# Altium PCB Microprocessor Module (328)_1.PcbDoc
Units mil, origin at the board's own origin, x right, y up, seen from the top; angles counter-clockwise.
Board outline 2850.55 x 2750.55 mil, 2 copper layers (Top Layer, Bottom Layer); 23 components, 27 nets, 115 pads, 36 vias.
Unrouted connection lines stored in the file: 26.
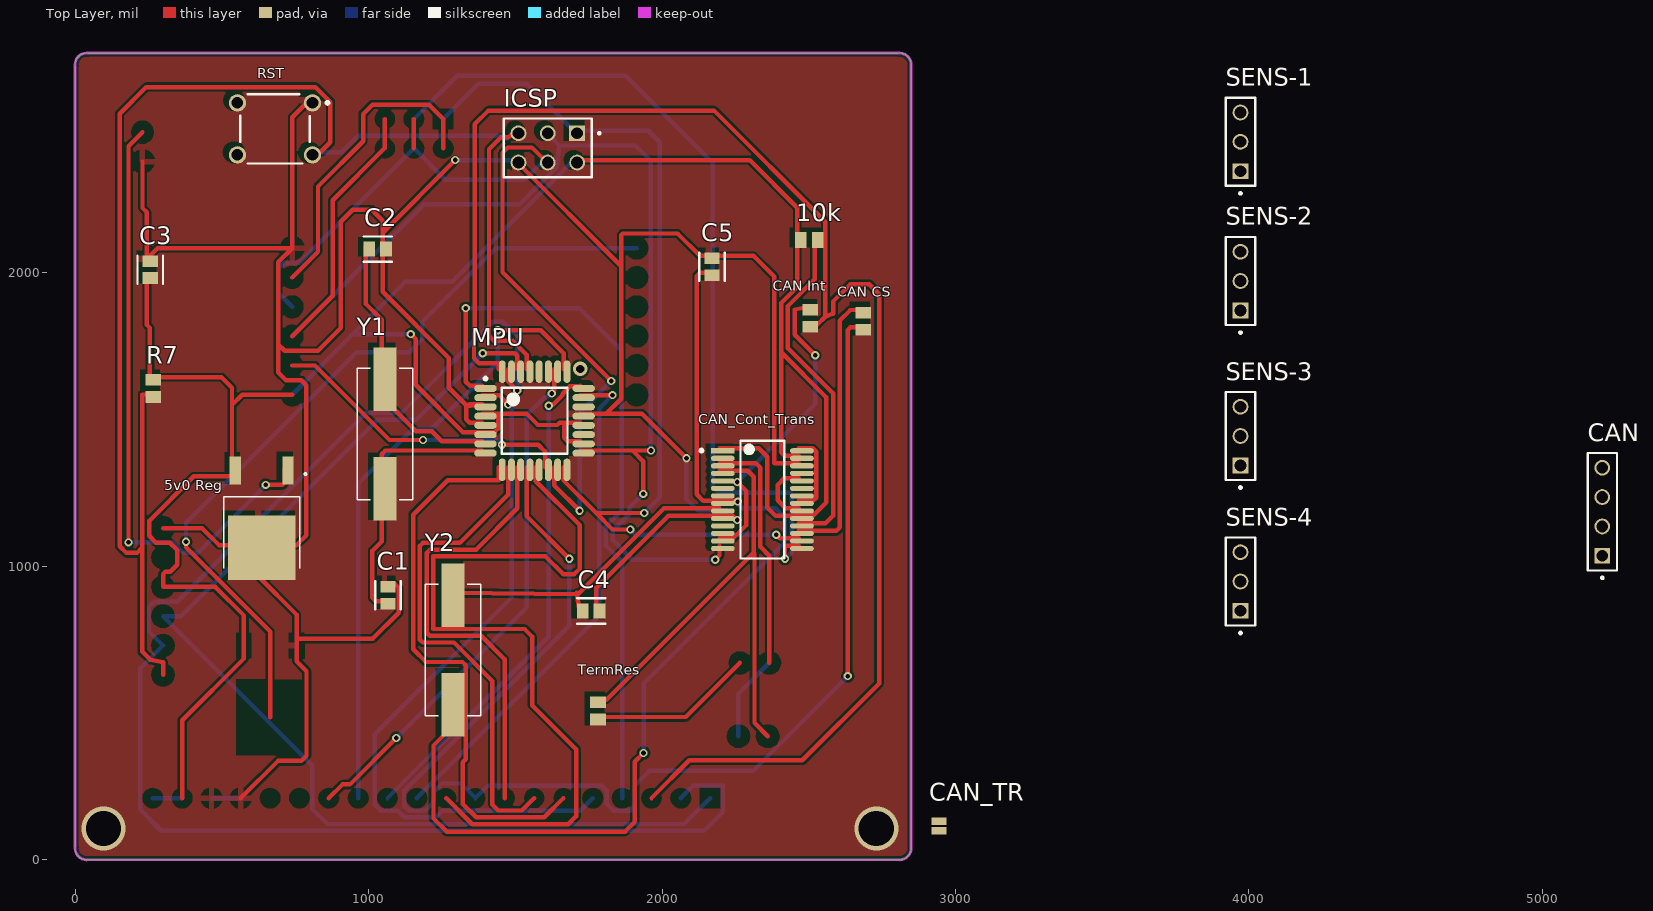
[diagram p0: Top Layer view]
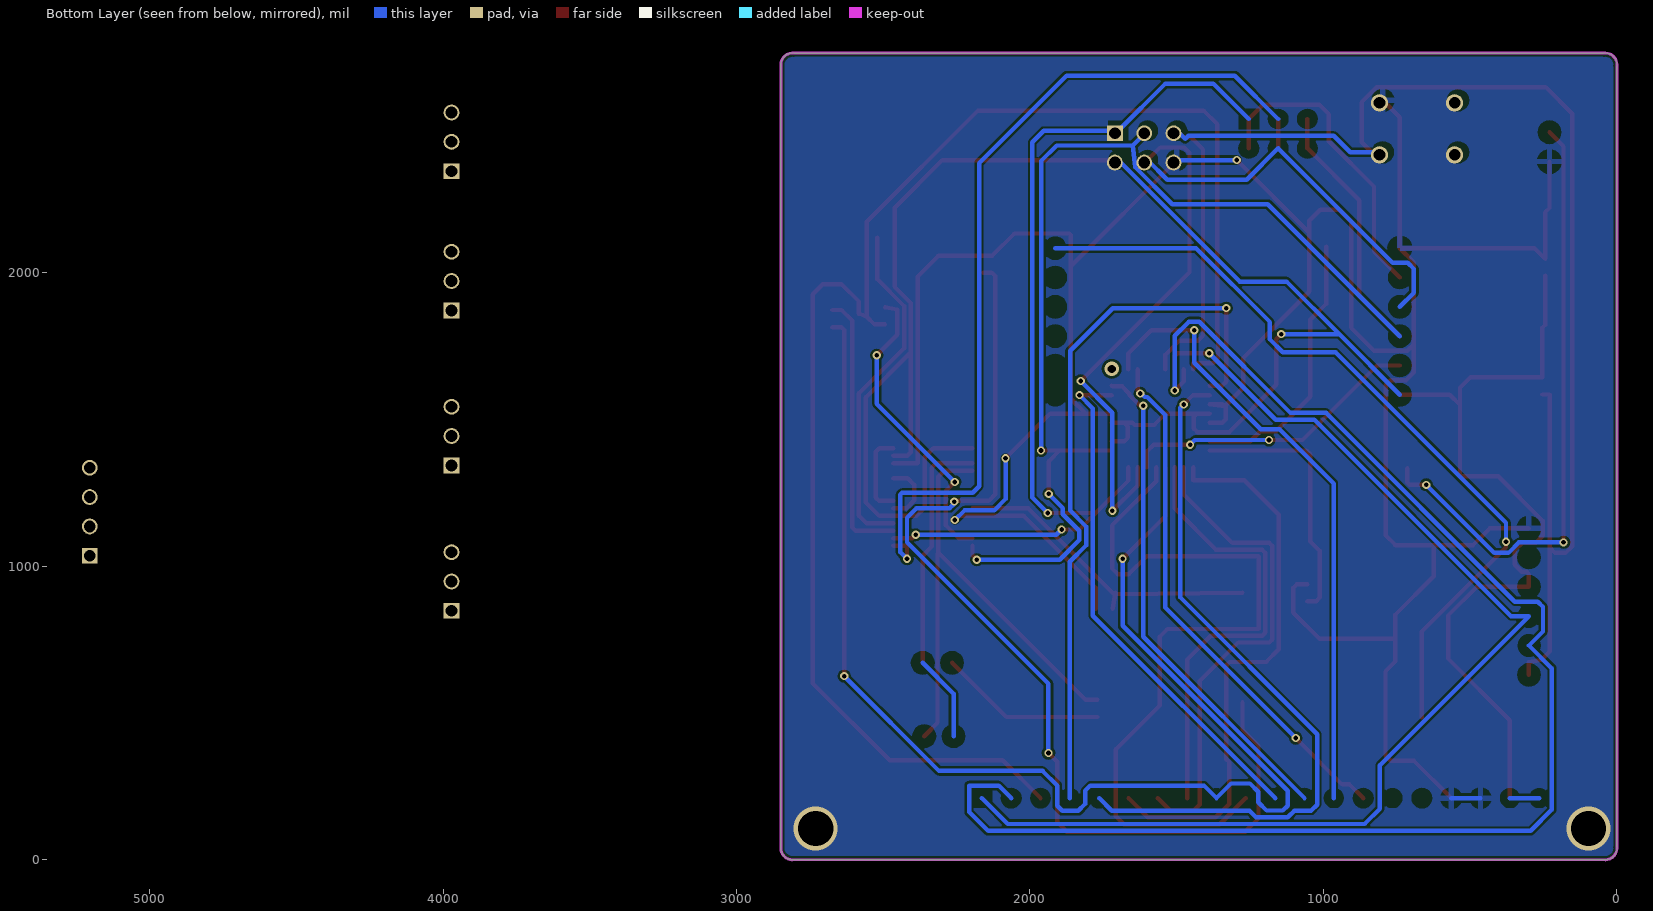
[diagram p1: Bottom Layer view, seen from below]

## Layer stack, top to bottom
Top Solder: solder mask 0.4, Solder Resist, Dk 3.5
Top Layer: signal copper 1.4
Dielectric 1: dielectric 12.6, FR-4, Dk 4.8
Bottom Layer: signal copper 1.4
Bottom Solder: solder mask 0.4, Solder Resist, Dk 3.5

## Board outline
43.61,-1.39 cw(c38.61,38.61) -1.39,43.61 -1.39,2703.61 cw(c38.61,2708.61) 43.61,2748.61 2803.61,2748.61 cw(c2808.61,2708.61) 2848.61,2703.61 2848.61,43.61 cw(c2808.61,38.61) 2803.61,-1.39

## Design rules (kind name [scope] priority, off if disabled: settings)
BoardOutlineClearance [All] p1: gap=7.87 ignorepadtopadclearanceinfootprint=FALSE except(15.75: Arc-SplitBarrior Arc-SplitContinuation Track-SplitBarrior Track-SplitContinuation SMDPad-SplitBarrior SMDPad-SplitContinuation THPad-SplitBarrior THPad-SplitContinuation Via-SplitBarrior Via-SplitContinuation Fill-SplitBarrior Fill-SplitContinuation Poly-SplitBarrior Poly-SplitContinuation Region-SplitBarrior Region-SplitContinuation Text-SplitBarrior Text-SplitContinuation)
Clearance "Clearance Bottom Layer" [OnLayer('Bottom Layer')] p1: gap=8 ignorepadtopadclearanceinfootprint=TRUE except(10: Arc-Text Track-Text SMDPad-Text THPad-Text Via-Text Fill-Text Poly-Text Region-Text Text-Text)
Clearance "Clearance Top Layer" [OnLayer('Top Layer')] p2: gap=8 ignorepadtopadclearanceinfootprint=TRUE except(10: Arc-Text Track-Text SMDPad-Text THPad-Text Via-Text Fill-Text Poly-Text Region-Text Text-Text)
Clearance [All] p3: gap=7.87 ignorepadtopadclearanceinfootprint=FALSE except(3.5: Arc-Arc Arc-Track Arc-SMDPad Track-Track Track-SMDPad SMDPad-SMDPad; 5: Arc-Via Track-Via SMDPad-Via THPad-Via Via-Via; 10: Arc-Text Track-Text SMDPad-Text THPad-Text Via-Text Fill-Text Poly-Text Region-Text Text-Text)
HoleSize [All] p1: absolutevalues=TRUE maxlimit=248.03 minlimit=7.87 maxpercent=80.000 minpercent=20.000
MinimumAnnularRing [All] p1: minimumring=3
MinimumSolderMaskSliver [All] p1: minsoldermaskwidth=3.94
PolygonConnect PolygonConnect_1 [All] p1: thpad.connectstyle=Relief thpad.reliefconductorwidth=20 thpad.reliefentries=4 thpad.polygonreliefangle="90 Angle" thpad.airgapwidth=10 smdpad.connectstyle=Relief smdpad.reliefconductorwidth=20 smdpad.reliefentries=4 smdpad.polygonreliefangle="90 Angle" smdpad.airgapwidth=10 via.connectstyle=Direct via.reliefconductorwidth=20 via.reliefentries=4 via.polygonreliefangle="90 Angle" via.airgapwidth=10
RoomDefinition "Microprocessor Module (328)" [InComponentClass('Microprocessor Module (328)')] p1: confinementstyle=ConfineIn formatcopy=TRUE lockcomponents=FALSE outline 2905,45 5130,45 5130,605 2905,605
RoutingCorners [All] p1: cornerstyle=Round minsetback=100 maxsetback=100
RoutingVias [All] p1: holewidth=16 width=28 viastyle="Through Hole" minholewidth=7.87 minwidth=17.72 maxholewidth=39.37 maxwidth=78.74
SilkToSilkClearance [All] p1: silktosilkclearance=3.94
SilkToSolderMaskClearance [IsPad] p1: minsilkscreentomaskgap=3.94 clearancetoexposedcopper=TRUE
SolderMaskExpansion [All] p1: expansion=4 istentingtop=FALSE
Width [All] p1: maxlimit=100 minlimit=3.5 preferedwidth=15
25 further rules are at their usual default settings.

## Components (designator, comment, footprint, x,y, rotation, side; value= is the part's Value field where it differs from the comment)
"5v0 Reg" "L7805CDTTR" VREG_L7805CDTTR 634.76,1159.92 r180 top
10k "10k" RESC2013X60X40LL20T25 2501.39,2111.39 r180 top
C1 "22pf" FP-GRM21B-0_15-IPC_C 1065,900.28 r90 top
C2 "22pf" FP-GRM21B-0_15-IPC_C 1030,2080.28 r0 top
C3 ".1uf" FP-GRM21B-0_15-IPC_C 255,2010.28 r90 top
C4 "27pf" FP-GRM21B-0_15-IPC_C 1757.8,846.39 r0 top
C5 "27pf" FP-GRM21B-0_15-IPC_C 2170,2020.28 r90 top
"CAN Con." "TSW-104-07-F-S" SAMTEC_TSW-104-07-F-S 5205,1185 r90 top
"CAN CS" "0R" RESC2013X60X40LL20T25 2685,1834.53 r90 top
"CAN Int" "0R" RESC2013X60X40LL20T25 2505,1844.53 r90 top
CAN_Cont_Trans "MCP25625T-E/SS" FP-C04-073-IPC_B 2341.54,1226.23 r0 top
CAN_TR "" SMT-JUMPER_2_NO_SILK 2943.61,113.61 r90 top
ICSP "TSW-103-07-F-D" SAMTEC_TSW-103-07-F-D 1610,2425.28 r180 top
MPU "ATmega328P-AU" 32A_M 1565,1495.28 r0 top
R7 "10k" RESC2013X60X40LL20T25 265,1605.75 r90 top
RST "TL1105SPF160Q" ESWI-TL1105SPF_V 680,2490.28 r180 top
SENS-1 "TSW-103-07-F-S" SAMTEC_TSW-103-07-F-S 3971.39,2445.97 r90 top
SENS-2 "TSW-103-07-F-S" SAMTEC_TSW-103-07-F-S 3971.39,1971.39 r90 top
SENS-3 "TSW-103-07-F-S" SAMTEC_TSW-103-07-F-S 3971.39,1443.09 r90 top
SENS-4 "TSW-103-07-F-S" SAMTEC_TSW-103-07-F-S 3971.39,947.26 r90 top
TermRes "120R" RESC2013X60X40LL20T25 1781.39,506.39 r90 top
Y1 "16MHz" XTAL_ECS-080-20-5PX-TR 1055,1450.28 r270 top
Y2 "8MHz" XTAL_ECS-080-20-5PX-TR 1286.39,713.4 r90 top

## Footprints (in the part's own frame and the unit in brackets; to place one, negate y for a bottom-side part, rotate by r counter-clockwise, add the part's x,y. Pads: shape width x height; smd on the part's side, far side on the other; paste and mask are expansions set on the pad)
32A_M [mm] "Thin QFP, 32-Leads, Body 7x7mm, Pitch 0.8mm, IPC Low Density"
  oval 1.95x0.6 smd: 1(-4.25,2.8) 2(-4.25,2) 3(-4.25,1.2) 4(-4.25,0.4) 5(-4.25,-0.4) 6(-4.25,-1.2) 7(-4.25,-2) 8(-4.25,-2.8) 17(4.25,-2.8) 18(4.25,-2) 19(4.25,-1.2) 20(4.25,-0.4) 21(4.25,0.4) 22(4.25,1.2) 23(4.25,2) 24(4.25,2.8)
  oval 0.6x1.95 smd: 9(-2.8,-4.25) 10(-2,-4.25) 11(-1.2,-4.25) 12(-0.4,-4.25) 13(0.4,-4.25) 14(1.2,-4.25) 15(2,-4.25) 16(2.8,-4.25) 25(2.8,4.25) 26(2,4.25) 27(1.2,4.25) 28(0.4,4.25) 29(-0.4,4.25) 30(-1.2,4.25) 31(-2,4.25) 32(-2.8,4.25)
  silkscreen extent -4.37,-2.85 2.85,3.77, body extent -3.5,-3.5 3.5,3.5, height 1.2
ESWI-TL1105SPF_V [mm] "THD, 4-Leads, Body 6x6mm"
  round 1.5 hole 1: 1(-3.25,-2.25) 2(3.25,-2.25) 3(-3.25,2.25) 4(3.25,2.25)
  silkscreen extent -4.68,-3 3,3, body extent -3.95,-3 3.95,3, height 7.4
FP-C04-073-IPC_B [mm]
  rect 2.053x0.455 smd paste+0 mask+0: 1(-3.425,4.225)
  rrect100% 2.053x0.455 smd paste+0 mask+0: 2(-3.425,3.575) 3(-3.425,2.925) 4(-3.425,2.275) 5(-3.425,1.625) 6(-3.425,0.975) 7(-3.425,0.325) 8(-3.425,-0.325) 9(-3.425,-0.975) 10(-3.425,-1.625) 11(-3.425,-2.275) 12(-3.425,-2.925) 13(-3.425,-3.575) 14(-3.425,-4.225) 15(3.425,-4.225) 16(3.425,-3.575) 17(3.425,-2.925) 18(3.425,-2.275) 19(3.425,-1.625) 20(3.425,-0.975) 21(3.425,-0.325) 22(3.425,0.325) 23(3.425,0.975) 24(3.425,1.625) 25(3.425,2.275) 26(3.425,2.925) 27(3.425,3.575) 28(3.425,4.225)
  silkscreen extent -5.4,-5.1 1.9,5.1, body extent -4.7,-5.35 4.7,5.35, height 0.25
FP-GRM21B-0_15-IPC_C [mil]
  rect 39.6x51.5 smd paste+0 mask+0: 1(-28.59,0) 2(28.59,0)
  silkscreen extent -48,-43 48,43, body extent -52,-31 52,31, height 10
RESC2013X60X40LL20T25 [mm] "Chip Resistor, 2-Leads, Body 2.00x1.25mm, IPC High Density"
  rect 1x1.35 smd: 1(-0.75,0) 2(0.75,0)
  body extent -1.1,-0.72 1.1,0.72, height 0.6
SAMTEC_TSW-103-07-F-D [mm]
  rect 1.37x1.37 hole 1.02: 01(-2.54,-1.27)
  round 1.37 hole 1.02: 02(-2.54,1.27) 03(0,-1.27) 04(0,1.27) 05(2.54,-1.27) 06(2.54,1.27)
  silkscreen extent -4.56,-2.54 3.81,2.54
SAMTEC_TSW-103-07-F-S [mm]
  rect 1.37x1.37 hole 1.02: 01(-2.54,0)
  round 1.37 hole 1.02: 02(0,0) 03(2.54,0)
  silkscreen extent -4.56,-1.27 3.81,1.27
SAMTEC_TSW-104-07-F-S [mm]
  rect 1.37x1.37 hole 1.02: 01(-3.81,0)
  round 1.37 hole 1.02: 02(-1.27,0) 03(1.27,0) 04(3.81,0)
  silkscreen extent -5.83,-1.27 5.08,1.27
SMT-JUMPER_2_NO_SILK [mil]
  rect 25x50 smd paste+0: 1(-16,0) 2(16,0)
VREG_L7805CDTTR [mm]
  rect 0.98x2.4 smd: 1(-2.28,-4.2) 2(2.28,-4.2)
  rect 5.86x5.57 smd paste-4: 3(0,2.47)
  silkscreen extent -3.89,-4 3.3,4.27
XTAL_ECS-080-20-5PX-TR [mm]
  rect 5.5x2 smd: 1(-4.75,0) 2(4.75,0)
  silkscreen extent -5.7,-2.4 5.7,2.4, body extent -6.6,-2.39 6.6,2.41, height 4.3

## Part data
"5v0 Reg": "LINEAR VOLT REG, 5V, 1.5A, TO-252-3; Fixed Output Voltage Nom.:5V; Adjustable Output Voltage Min:-; Adjustable Output Voltage Max:-; Input Voltage Min:10V; Input Voltage Max:35V; Product Range:5V 1.5A Linear Voltage Regulators; Output Current:1.5A; Output Type:Fixed; Linear Regulator Case Style:TO-252; No. of Pins:3Pins; Operating Temperature Min:0Â°C; Operating Temperature Max:125Â°C; Automotive Qualification Standard:-; MSL:MSL 1 - Unlimited; SVHC:No SVHC (15-Jan-2018)", Package=None, Availability="In Stock", Check_prices=https://www.snapeda.com/parts/L7805CDTTR/STMicroelectronics/view-part/?ref=eda, MF=STMicroelectronics, MP=L7805CDTTR, Price=None, Purchase-URL=https://pricing.snapeda.com/search/part/L7805CDTTR/?ref=eda, SnapEDA_Link=https://www.snapeda.com/parts/L7805CDTTR/STMicroelectronics/view-part/?ref=snap
10k "CAN CS" "CAN Int" R7 TermRes: library part CMP-2001-00645-1, Manufacturer=Panasonic, Part Number=ERA6AEB473V
C1 C2 C3 C4 C5: library part CMP-2007-03541-2, "Chip Multilayer Ceramic Capacitors for General Purpose, 0805, 10uF, X5R, 15%, 10%, 25V", Capacitance=10uF, Case Code (Imperial)=0805, Case Code (Metric)=2012, Dielectric=X5R, Max Operating Temperature=85°C, Min Operating Temperature=-55°C, Package Quantity=1, Tolerance=10%, Voltage=25V, Case/Package=0805, Depth=1.25mm, Height=1.25mm, Lead Free="Lead Free", Length=2mm, Material=Ceramic, Mount="Surface Mount", Packaging="Tape and Reel", Radiation Hardening=No, Termination=SMD/SMT, Thickness=0.053inch, Voltage Rating=25V, Voltage Rating (DC)=25V, Width=0.049inch
"CAN Con." ICSP SENS-1 SENS-2 SENS-3 SENS-4: Package=None, Availability=Unavailable, MF=Samtec, Price=None
  "CAN Con.": MP=TSW-104-07-F-S
  ICSP: MP=TSW-103-07-F-D
  SENS-1 SENS-2 SENS-3 SENS-4: MP=TSW-103-07-F-S
CAN_Cont_Trans: library part CMP-06279-000016-1, "IC TRANSCEIVER 1/1 28SSOP", Case/Package=SSOP, Max Operating Temperature=125°C, Max Supply Voltage=5.5V, Min Operating Temperature=-40°C, Min Supply Voltage=4.5V, Operating Supply Current=70mA, Package Quantity=2100, Data Rate=1Mbps, Interface=SPI, Mount="Surface Mount", Number of Drivers=1, Number of Pins=28, Number of Receivers=1, Number of Transceivers=1, Packaging="Tape and Reel", Propagation Delay=125ns, Receiver Hysteresis=200mV, RoHS Compliant=Yes, Weight=0.080001oz
CAN_TR: library part JUMPER-SMT_2_NO_SILK, Package=SMT-JUMPER_2_NO_SILK, DeviceName=_SILK, DeviceSetName=JUMPER-SMT_2_NO, GateName_1=G$1, LibraryName=SparkFun-Jumpers, SymbolName_1=SMT-JUMPER_2_NO
MPU: library part CMP-0095-00269-2, "8-bit AVR Microcontroller, 32KB Flash, 1KB EEPROM, 2KB SRAM, 32-pin TQFP, Industrial Grade (-40°C to 85°C)", Code_JEDEC=MS-026-ABA, ComponentLink1Description="Manufacturer URL", ComponentLink1URL=http://www.atmel.com/, ComponentLink2Description="ATmega48A/48PA/88A/88PA/168A/168PA/328/328P Datasheet", ComponentLink2URL=http://www.atmel.com/dyn/resources/prod_documents/doc8271.pdf, ComponentLink3Description="ATmega48A/48PA/88A/88PA/168A/168PA/328/328P Summary", ComponentLink3URL=http://www.atmel.com/dyn/resources/prod_documents/8271S.pdf, DatasheetVersion="revD, May-2011", PackageDescription="32-Lead, 7x7x1.0 mm Body, 0.8mm Lead Pitch, Thin Profile Plastic Quad Flat Package (TQFP)", PackageReference=32A, PackageVersion="revC, Oct-2010", RevisionNote="DatasheetVersion & PackageVersion updated. URLs added."
RST: library part CMP-2000-07248-1, "Tact Switch, SPST-NO, 50 mA, 12 VDC, -20 to 70 degC, 4-Pin THD, RoHS, Bulk", Manufacturer=E-Switch, Package Description="4-Pin Through Hole Device, Body 6 x 6 mm", Package Reference=TL1105SPF, Actuation Force=1.6N, Actuator Style=RoundButton, Contact Material=Silver, Datasheet URL=https://www.e-switch.com/system/asset/product_line/data_sheet/140/TL1105.pdf, Datasheet Version=12/2013, Manufacturer URL=http://www.e-switch.ch/en/, Mounting Technology=ThroughHole, Package URL=http://spec_sheets.e-switch.com/specs/P010201.pdf, Size=6x6mm, Termination Style=RightAngle
Y1 Y2: library part ECS-080-20-5PX-TR, "8 MHz Â±30ppm Crystal 20pF 60 Ohms HC-49/US", Package="HC49/US ECS International", Availability="In Stock", Check_prices=https://www.snapeda.com/parts/ECS-080-20-5PX-TR/ECS+Inc./view-part/?ref=eda, MF=ECS, MP=ECS-080-20-5PX-TR, Price=None, Purchase-URL=https://pricing.snapeda.com/search/part/ECS-080-20-5PX-TR/?ref=eda, SnapEDA_Link=https://www.snapeda.com/parts/ECS-080-20-5PX-TR/ECS+Inc./view-part/?ref=snap

## Via types
v1: diameter 28, hole 16, Top Layer to Bottom Layer, 33 vias
v2: diameter 150, hole 120, Top Layer to Bottom Layer, 2 vias
v3: diameter 50, hole 28, Top Layer to Bottom Layer, 1 vias

## Nets (pads, with @x,y where several pads share a name; then routed paths per layer and width w, separated by ;. In a path a pad name is that pad's centre, name@x,y a point inside that pad or via, vN(x,y) a via of type N, cw(c..) or ccw(c..) an arc to the next point about the centre after c; other vN are vias at no path point)
A0: MPU.23 SENS-1.02 | length 1759.7
  Top Layer w15: MPU.23@1720.93,1582.62 v1(1830.61,1582.62)
  Bottom Layer w15: 1163.61,208.89 1785.11,830.39 1785.11,1537.12 v1(1830.61,1582.62)
A1: MPU.24 SENS-2.02 | length 1703.5
  Top Layer w15: v1(1613.61,1546.61) 1616.1,1549.1 1626.7,1549.1 1660.78,1583.18 1660.78,1587.67 1685.58,1612.47 1719.28,1612.47 MPU.24@1720.93,1614.12
  Bottom Layer w15: 1063.61,208.89 1613.61,758.89 v1(1613.61,1546.61)
A2: MPU.25 SENS-3.02 | length 2140.3
  Top Layer w15: v1(1439.61,1803.61) 1585.84,1803.61 1663.84,1725.61 MPU.25@1663.84,1671.21
  Bottom Layer w15: 963.61,208.89 963.61,1281.13 1148.63,1466.15 1212.66,1466.15 1439.61,1693.09 v1(1439.61,1803.61)
A3: MPU.26 SENS-4.02 | length 1802.7
  Top Layer w15: 863.61,208.89 910.33,255.61 935.61,255.61 v1(1093.61,413.61) ; v1(1623.76,1587.89) 1623.76,1591.4 1632.35,1599.99 MPU.26@1632.35,1671.21
  Bottom Layer w15: v1(1093.61,413.61) 1538.61,858.61 1538.61,1514.87 1599.85,1576.11 1608.47,1576.11 1620.25,1587.89 v1(1623.76,1587.89)
CAN_CS: "CAN CS.2" CAN_Cont_Trans.17 | length 933.5
  Top Layer w15: CAN_Cont_Trans.17@2465,1119.69 2593.61,1119.69 2605.61,1131.69 2605.61,1836.66 2641.61,1872.66 2673.61,1872.66
CAN_INT: "CAN Int.2" CAN_Cont_Trans.13 | length 1040.7
  Top Layer w15: CAN_Cont_Trans.13@2195.3,1094.1 2241.61,1094.1 2287.11,1139.6 2287.11,1255.11 v1(2255.61,1286.61) ; 2493.61,1882.66 2451.53,1874.59 2451.53,1788.61 v1(2521.61,1718.53)
  Bottom Layer w15: v1(2255.61,1286.61) 2521.61,1552.61 v1(2521.61,1718.53)
CAN_MISO: CAN_Cont_Trans.16 ICSP.01 MPU.16 | length 3248.4
  Top Layer w15: MPU.16@1663.84,1336.56 1663.84,1291.63 1774.87,1180.61 ; v1(1891.61,1124.61) 1830.87,1124.61 1774.87,1180.61 ; v1(1938.61,1180.61) 1774.87,1180.61 ; v1(2388.61,1106.61) 2401.12,1094.1 CAN_Cont_Trans.16@2465,1094.1
  Bottom Layer w15: 1253.61,2523.88 1374.33,2644.61 1537.88,2644.61 1698.61,2483.88 1952.33,2483.88 1991.61,2444.61 1991.61,1233.61 v1(1938.61,1180.61) ; v1(1891.61,1124.61) 1909.61,1106.61 v1(2388.61,1106.61)
CAN_MOSI: CAN_Cont_Trans.15 ICSP.04 MPU.15 | length 6074.8
  Top Layer w15: 1153.61,2423.88 1153.61,2523.88 ; ICSP.04@1598.61,2383.88 1555.88,2426.61 1473.61,2426.61 1455.61,2408.61 1455.61,2001.61 v1(1826.61,1630.61) ; MPU.15@1632.35,1336.56 1632.35,1274.87 v1(1718.61,1188.61) ; v1(2418.61,1024.61) 2418.61,1068.51 CAN_Cont_Trans.15@2465,1068.51
  Bottom Layer w15: 738.61,1883.61 690.61,1931.61 690.61,2012.61 711.61,2033.61 763.33,2033.61 1153.61,2423.88 1260.88,2316.61 1531.33,2316.61 ICSP.04@1598.61,2383.88 ; 1153.61,2523.88 1301.33,2671.61 1874.61,2671.61 2172.61,2373.61 2172.61,1271.61 2194.61,1249.61 2435.61,1249.61 2441.61,1243.61 2441.61,1047.61 v1(2418.61,1024.61) ; v1(1718.61,1188.61) 1718.61,1522.61 v1(1826.61,1630.61)
CAN_RX: CAN_Cont_Trans.21 CAN_Cont_Trans.28 | length 286.1
  Top Layer w15: CAN_Cont_Trans.21@2465,1222.05 2514.05,1222.05 2525.11,1233.11 2525.11,1389.68 2513.61,1401.18 CAN_Cont_Trans.28@2465,1401.18
CAN_SCK: CAN_Cont_Trans.14 ICSP.03 MPU.17 | length 4513.3
  Top Layer w15: 738.61,1783.61 876.61,1921.61 876.61,2246.88 1053.61,2423.88 1053.61,2523.88 ; MPU.17@1720.93,1393.65 1898.57,1393.65 ; v1(1935.61,1245.85) 1935.61,1356.61 1898.57,1393.65 ; v1(1961.61,1393.65) 1898.57,1393.65 ; v1(2180.61,1021.61) 2195.3,1036.3 CAN_Cont_Trans.14@2195.3,1068.51
  Bottom Layer w15: 738.61,1783.61 1188.61,2233.61 1514.61,2233.61 1641.08,2360.08 1648.88,2433.61 ; ICSP.03@1598.61,2483.88 1648.88,2433.61 ; v1(1935.61,1245.85) 1887.37,1197.61 1887.37,1176.37 1831.11,1120.11 1831.11,1088.61 1898.11,1021.61 v1(2180.61,1021.61) ; v1(1961.61,1393.65) 1961.61,2380.61 1908.61,2433.61 1648.88,2433.61
CAN_TX: CAN_Cont_Trans.20 CAN_Cont_Trans.24 | length 215.7
  Top Layer w15: CAN_Cont_Trans.20@2465,1196.46 2421.61,1196.46 2393.61,1224.46 2393.61,1276.61 2415.82,1298.82 CAN_Cont_Trans.24@2465,1298.82
CANH: "CAN Con..04" CAN_Cont_Trans.4 CAN_TR.1 | length 1778.8
  Top Layer w15: 1770,544.53 1810.1,544.53 2311.9,1046.32 ; CAN_Cont_Trans.4@2195.3,1324.41 2291.54,1324.41 2311.9,1304.06 2311.9,1046.32 ; 2360,420 2314.61,465.39 2314.61,1043.61 2311.9,1046.32
CANL: "CAN Con..03" CAN_Cont_Trans.3 TermRes.1 | length 1394.5
  Top Layer w15: TermRes.1@1770,485.47 2080.47,485.47 2265,670 ; CAN_Cont_Trans.3@2195.3,1350 2319.61,1350 2334.9,1334.71 2334.9,1065.32 2365,1035.22 2365,670
CS: "CAN CS.1" MPU.14 | length 1037.7
  Top Layer w15: 738.61,1683.61 816.61,1683.61 1070.61,1429.61 v1(1184.61,1429.61) ; v1(1453.61,1413.61) 1577.85,1413.61 1600.85,1390.61 MPU.14@1600.85,1336.56
  Bottom Layer w15: v1(1184.61,1429.61) 1437.61,1429.61 v1(1453.61,1413.61)
D2: "CAN Int.1" MPU.32 | length 5208.2
  Top Layer w15: MPU.32@1443.37,1671.21 1443.37,1690.61 1376.61,1690.61 1358.61,1708.61 1358.61,1794.61 1360.61,1796.61 1360.61,2505.61 1407.61,2552.61 2176.61,2552.61 2555.61,2173.61 2555.61,1849.61 ; 1963.61,208.89 2092.33,337.61 2477.61,337.61 2739.61,599.61 2739.61,1926.61 2705.61,1960.61 2641.61,1960.61 2582.61,1901.61 2582.61,1860.61 2555.61,1849.61 ; 2493.61,1823.61 2529.61,1823.61 2555.61,1849.61
GND: "5v0 Reg.3" "CAN Con..02" C1.2 C2.2 C3.2 C4.2 C5.2 CAN_Cont_Trans.10 CAN_Cont_Trans.26 ICSP.06 MPU.3 MPU.5 MPU.21 RST.1 SENS-1.01 SENS-2.01 SENS-3.01 SENS-4.01 | length 10840.9
  Top Layer w15: 228.61,2378.88 228.61,2220.61 243.61,2205.61 243.61,2047.48 279.74,2083.61 738.61,2083.61 ; 298.61,1128.88 431.61,1128.88 489.21,1071.29 623.37,1071.29 ; 563.61,208.89 690.33,335.61 769.61,335.61 787.61,353.61 787.61,641.61 753.61,675.61 753.61,728.89 753.61,752.61 ; RST.1@796.56,2587.47 738.61,2529.51 738.61,2083.61 ; C1.2@1053.61,937.48 1089.61,937.48 1101.61,925.48 1101.61,840.61 1013.61,752.61 753.61,752.61 ; v1(1294.61,2383.88) 1047.2,2136.48 ; MPU.5@1386.29,1488.14 1344.08,1488.14 1331.61,1500.61 1331.61,1540.61 1335.87,1544.87 ; ICSP.06@1498.61,2383.88 1860.61,2021.88 ; MPU.21@1720.93,1519.63 1809.61,1519.63 ; C4.2@1775,855 1775,925.26 2020.61,1170.87 2195.3,1170.87 2241.35,1170.87 v1(2255.61,1156.61) ; v1(2082.61,1367.61) 1930.58,1519.63 1809.61,1519.63 ; CAN_Cont_Trans.26@2465,1350 2383.61,1350 2382.53,1351.08 2382.53,1986.55 2311.61,2057.48 2158.61,2057.48 2128.74,2057.48 2052.61,2133.61 1865.61,2133.61 1860.61,2128.61 1860.61,2021.88 ; 623.37,1071.29 623.37,964.85 753.61,834.61 753.61,752.61 ; 623.37,1071.29 753.61,1071.29 786.61,1104.29 786.61,1616.61 769.61,1633.61 717.61,1633.61 690.61,1660.61 690.61,1756.61 ; 690.61,1756.61 690.61,2035.61 738.61,2083.61 ; 690.61,1756.61 713.61,1733.61 826.61,1733.61 904.61,1811.61 904.61,2173.61 945.61,2214.61 1009.61,2214.61 1047.2,2177.02 1047.2,2136.48 ; 1047.2,2136.48 1047.2,2088.88 1047.2,1934.61 1272.71,1709.1 1272.71,1608.03 1335.87,1544.87 ; 1335.87,1544.87 1342.13,1551.13 1386.29,1551.13 1335.87,1544.87 ; 1809.61,1519.63 1860.61,1570.63 1860.61,2021.88
  Bottom Layer w15: 463.61,208.89 563.61,208.89 ; v1(1294.61,2383.88) ICSP.06@1498.61,2383.88 ; v1(2082.61,1367.61) 2082.61,1228.61 2121.61,1189.61 2222.61,1189.61 v1(2255.61,1156.61)
  other v2: 95,105 2730,105
Net10k_1: 10k.1 CAN_Cont_Trans.18 | length 1178.4
  Top Layer w15: CAN_Cont_Trans.18@2465,1145.28 2556.28,1145.28 2582.61,1171.61 2582.61,1588.61 2428.53,1742.68 2428.53,1886.53 2519.53,1977.53 10k.1@2519.53,2120
NetC1_1: C1.1 MPU.8 Y1.2 | length 896.4
  Top Layer w15: C1.1@1053.61,880.29 1023.92,880.29 1011.61,892.61 1011.61,1051.61 1043.61,1083.61 1043.61,1271.88 1043.61,1380.61 1056.65,1393.65 MPU.8@1386.29,1393.65
NetC2_1: C2.1 MPU.7 Y1.1 | length 939.9
  Top Layer w15: C2.1@990.02,2088.88 990.02,1893.2 1043.61,1839.61 1043.61,1645.89 1043.61,1576.61 1160.67,1459.55 1214.23,1459.55 1248.63,1425.14 MPU.7@1386.29,1425.14
NetC4_1: C4.1 CAN_Cont_Trans.9 Y2.2 | length 1103.5
  Top Layer w15: Y2.2@1275,909.02 1275,908.61 1708.72,903.76 ; C4.1@1717.82,855 1708.72,903.76 ; CAN_Cont_Trans.9@2195.3,1196.46 2005.46,1196.46 1712.71,903.71 ; 1708.72,903.76 1707.82,908.61 1712.71,903.71 ; 1708.72,903.76 1712.71,903.71
NetC5_1: C5.1 CAN_Cont_Trans.8 Y2.1 | length 3513.4
  Top Layer w15: Y2.1@1275,535 1275,442.61 1220.61,388.22 1220.61,139.61 1265.61,94.61 1873.61,94.61 1906.61,127.61 1906.61,332.61 v1(1936.61,362.61) ; C5.1@2158.61,2000.29 2129.29,2000.29 2117.61,1988.61 2117.61,1244.61 2140.17,1222.05 2195.3,1222.05 2255.17,1222.05 v1(2257.61,1219.61)
  Bottom Layer w15: v1(1936.61,362.61) 1936.61,598.61 2418.61,1080.61 2418.61,1164.61 2386.61,1196.61 2273.61,1196.61 2257.61,1212.61 v1(2257.61,1219.61)
NetCAN_TR_2: CAN_TR.2 TermRes.2
"PWR IN": "5v0 Reg.1" "CAN Con..01" | length 2114.3
  Top Layer w15: v1(180.61,1080.61) 180.61,2430.88 228.61,2478.88 ; v1(648.61,1276.61) 705.14,1276.61 713.14,1284.61 713.14,1333.88
  Bottom Layer w15: v1(180.61,1080.61) 332.61,1080.61 368.61,1044.61 416.61,1044.61 v1(648.61,1276.61)
RESET: ICSP.05 MPU.29 R7.1 RST.3 | length 5293.7
  Top Layer w15: R7.1@253.61,1584.83 227.61,1584.83 227.61,1062.61 ; 298.61,628.89 298.61,671.61 255.61,680.61 227.61,708.61 227.61,1062.61 ; RST.3@796.56,2410.3 834.3,2410.3 868.61,2444.61 868.61,2581.61 817.61,2632.61 241.61,2632.61 150.61,2541.61 150.61,1067.61 173.61,1044.61 209.61,1044.61 227.61,1062.61 ; ICSP.05@1498.61,2483.88 1475.82,2461.1 1449.63,2461.1 1409.61,2421.08 1409.61,1784.61 1425.61,1768.61 1489.61,1768.61 1537.86,1720.36 MPU.29@1537.86,1671.21
  Bottom Layer w15: RST.3@796.56,2410.3 907.3,2410.3 963.61,2466.61 1459.33,2466.61 1470.33,2455.61 ICSP.05@1498.61,2483.88
SCL: MPU.28
SDA: MPU.27
VCC: 10k.2 "5v0 Reg.2" C3.1 CAN_Cont_Trans.1 CAN_Cont_Trans.19 CAN_Cont_Trans.27 ICSP.02 MPU.4 MPU.6 MPU.18 MPU.20 R7.2 SENS-1.03 SENS-2.03 SENS-3.03 SENS-4.03 | length 8410.9
  Top Layer w15: C3.1@243.61,1990.29 243.61,1821.61 253.61,1811.61 253.61,1643.88 497.61,1643.88 533.61,1607.88 533.61,1548.61 ; 363.61,208.89 363.61,474.14 574.08,684.61 574.08,728.89 574.08,831.14 476.33,928.89 298.61,928.89 298.61,972.61 306.61,980.61 322.61,980.61 346.61,1004.61 346.61,1054.61 321.61,1079.61 274.61,1079.61 251.22,1103 251.22,1153.88 402.94,1305.61 533.61,1305.61 533.61,1333.88 533.61,1548.61 ; 738.61,1583.61 568.61,1583.61 533.61,1548.61 ; v1(1142.61,1790.61) 1159.61,1773.61 1159.61,1617.61 1320.58,1456.64 1386.29,1456.64 1428.64,1456.64 1440.61,1468.61 1440.61,1508.61 MPU.4@1429.58,1519.63 ; MPU.4@1386.29,1519.63 MPU.4@1429.58,1519.63 ; ICSP.02@1698.61,2383.88 2298.2,2383.88 2460.47,2221.61 2460.47,2120 2460.47,1951.47 2405.53,1896.53 2405.53,1728.88 ; MPU.18@1720.93,1425.14 1678.07,1425.14 1666.61,1436.61 1666.61,1476.61 1678.14,1488.14 ; MPU.20@1720.93,1488.14 1678.14,1488.14 ; CAN_Cont_Trans.1@2195.3,1401.18 2329.61,1401.18 2358.61,1372.18 2358.61,1199.64 2387.38,1170.87 2465,1170.87 2513.61,1170.87 2559.61,1216.87 2559.61,1574.81 2405.53,1728.88 ; CAN_Cont_Trans.27@2465,1375.59 2417.61,1375.59 2405.53,1387.67 2405.53,1728.88 ; MPU.4@1429.58,1519.63 1537.61,1519.63 1576.35,1480.89 1642.86,1480.89 1650.1,1488.14 1678.14,1488.14
  Bottom Layer w15: 263.61,208.89 363.61,208.89 ; 738.61,1583.61 945.61,1790.61 ; v1(1142.61,1790.61) 945.61,1790.61 ; ICSP.02@1698.61,2383.88 1284.4,1969.67 1124.67,1969.67 945.61,1790.61
pads on no net: CAN_Cont_Trans.2 CAN_Cont_Trans.5 CAN_Cont_Trans.6 CAN_Cont_Trans.7 CAN_Cont_Trans.11 CAN_Cont_Trans.12 CAN_Cont_Trans.22 CAN_Cont_Trans.23 CAN_Cont_Trans.25 MPU.1 MPU.2 MPU.9 MPU.10 MPU.11 MPU.12 MPU.13 MPU.19 MPU.22 MPU.30 MPU.31 RST.2 RST.4
copper on no net: | length 30356.3
  Top Layer w15: v1(376.61,1082.61) 376.61,1063.61 663.84,776.37 663.84,484.79 ; 738.61,1983.61 826.61,2071.61 826.61,2293.61 980.61,2447.61 980.61,2540.61 1012.61,2572.61 1204.88,2572.61 1253.61,2523.88 1253.61,2423.88 ; 1263.61,208.89 1352.88,119.61 1679.61,119.61 1706.61,146.61 1706.61,375.61 1556.61,525.61 1556.61,759.61 1530.97,785.25 1220.13,785.25 1220.13,1032.79 1602.43,1032.79 1662.61,972.61 1700.61,972.61 1719.61,991.61 1719.61,1139.08 1569.36,1289.33 1569.36,1336.56 ; v1(1330.61,1879.11) 1330.61,1628.61 1345.1,1614.12 1386.29,1614.12 ; 1386.29,1582.62 1443.59,1582.62 v1(1475.61,1550.61) ; v1(1388.61,1725.61) 1497.61,1725.61 1506.36,1716.85 1506.36,1671.21 ; 1443.37,1336.56 1443.37,1292.61 1268.61,1292.61 1151.13,1175.13 1151.13,716.25 1194.65,672.73 1319.49,672.73 1330.61,661.61 1330.61,341.61 1320.61,331.61 1320.61,188.61 1365.8,143.42 1598.14,143.42 1663.61,208.89 ; 1463.61,208.89 1463.61,681.61 1382.97,762.25 1207.49,762.25 1197.13,772.61 1197.13,1044.61 1208.31,1055.79 1365.54,1055.79 1506.36,1196.61 1506.36,1336.56 ; 1474.87,1336.56 1474.87,1243.61 1310.05,1078.79 1184.31,1078.79 1174.13,1068.61 1174.13,748.61 1183.49,739.25 1289.97,739.25 1421.14,608.08 1421.14,186.89 1441.61,166.42 1521.14,166.42 1563.61,208.89 ; 1474.87,1671.21 1474.87,1629.09 v1(1505.61,1598.35) ; 1537.86,1336.56 1537.86,1170.36 v1(1683.61,1024.61) ; v1(2632.61,624.61) 2632.61,1804.61 2641.61,1813.61 2673.61,1813.61
  Bottom Layer w15: v1(376.61,1082.61) 376.61,1147.61 957.61,1728.61 1137.61,1728.61 1181.61,1772.61 1181.61,1831.61 1433.61,2083.61 1913.61,2083.61 ; v1(1330.61,1879.11) 1717.16,1879.11 1862.61,1733.66 1862.61,1189.28 1808.11,1134.78 1808.11,1070.11 1863.61,1014.61 1863.61,208.89 ; v1(1388.61,1725.61) 1161.85,1498.85 1029.75,1498.85 359.78,828.89 298.61,828.89 806.61,320.89 806.61,172.61 858.8,120.42 2075.14,120.42 2163.61,208.89 ; v1(1475.61,1550.61) 1486.61,1539.61 1486.61,892.61 1020.61,426.61 1020.61,186.61 1041.61,165.61 1098.14,165.61 1120.33,143.42 1228.84,143.42 1251.04,165.61 1720.33,165.61 1763.61,208.89 ; v1(1505.61,1598.35) 1505.61,1785.11 1457.61,1833.11 1422.61,1833.11 1111.35,1521.85 989.85,1521.85 346.61,878.61 268.61,878.61 250.61,860.61 250.61,776.89 298.61,728.89 220.61,650.89 220.61,169.61 292.8,97.42 2142.41,97.42 2206.61,161.61 2206.61,251.61 2106.33,251.61 2063.61,208.89 ; v1(1683.61,1024.61) 1683.61,796.36 1121.14,233.89 1121.14,182.89 1137.61,166.42 1192.94,166.42 1221.14,194.61 1221.14,230.14 1249.61,258.61 1313.88,258.61 1363.61,208.89 1406.33,251.61 1793.61,251.61 1811.61,233.61 1811.61,188.61 1834.61,165.61 1889.61,165.61 1906.61,182.61 1906.61,251.61 1956.61,301.61 2309.61,301.61 v1(2632.61,624.61) ; 2260,420 2260,565 2365,670
  other v3: 1721.05,1672.05

## Polygon pours and split planes (outlines as drawn)
GND on Top Layer "GND_L01_P000" (solid, pour order 0): 43.61,-1.39 cw(c38.61,38.61) -1.39,43.61 -1.39,2703.61 cw(c38.61,2708.61) 43.61,2748.61 2803.61,2748.61 cw(c2808.61,2708.61) 2848.61,2703.61 2848.61,43.61 cw(c2808.61,38.61) 2803.61,-1.39
GND on Bottom Layer "GND_L02_P001" (solid, pour order 1): 43.61,-1.39 cw(c38.61,38.61) -1.39,43.61 -1.39,2703.61 cw(c38.61,2708.61) 43.61,2748.61 2803.61,2748.61 cw(c2808.61,2708.61) 2848.61,2703.61 2848.61,43.61 cw(c2808.61,38.61) 2803.61,-1.39

## Keep-outs
Keep-Out Layer:
  the board outline again, w10